# Altium PCB SystemV1.PcbDoc (part 1 of 3)
Units mm, origin at the board's own origin, x right, y up, seen from the top; angles counter-clockwise.
Board outline 488.95 x 74.14 mm, 4 copper layers (Top Layer, GND, VCC, Bottom Layer), stack 1.586 mm thick; 264 components, 188 nets, 862 pads, 658 vias.
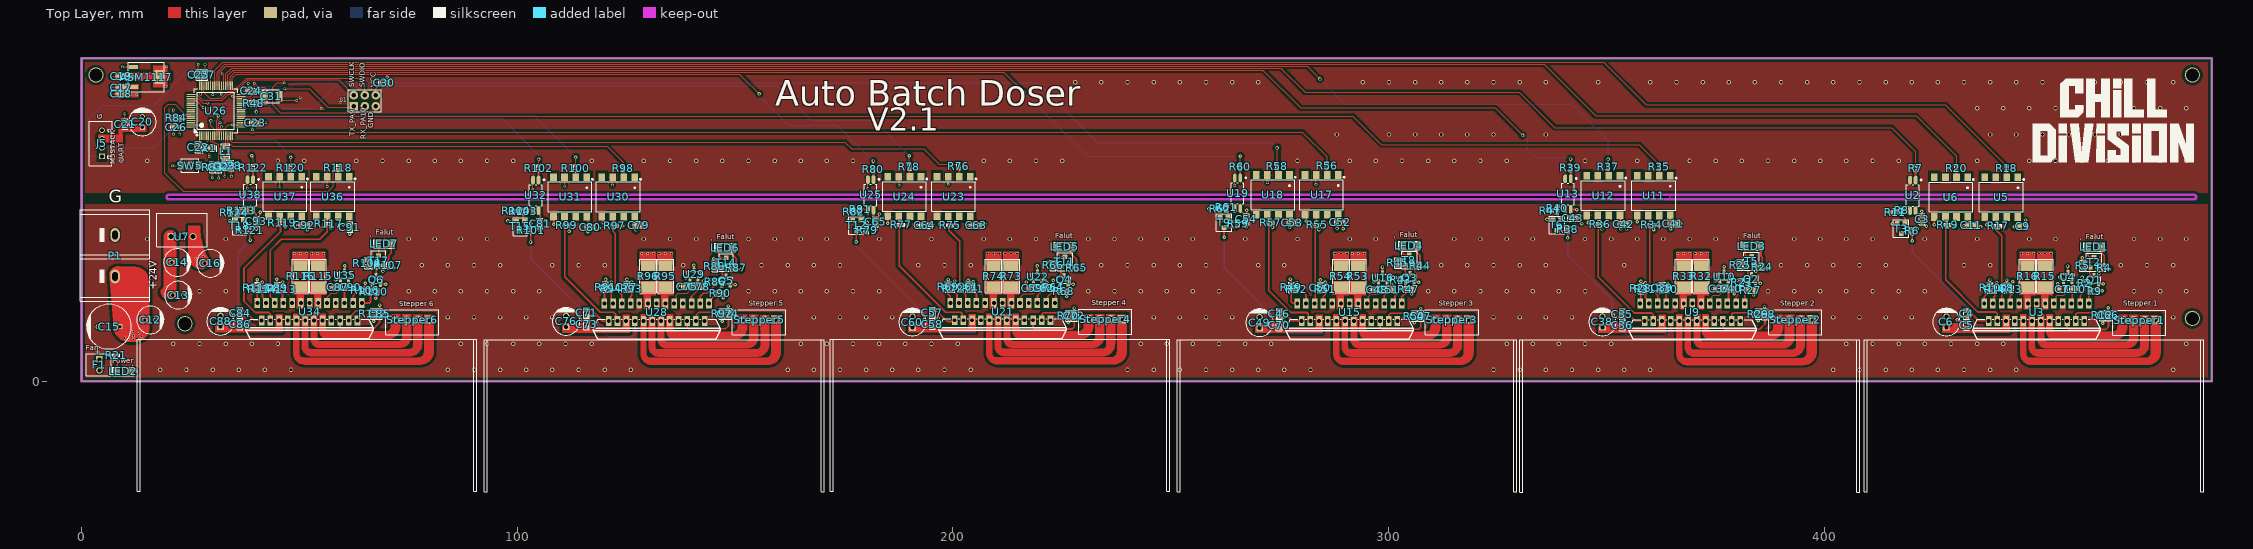
[diagram p0: Top Layer view]
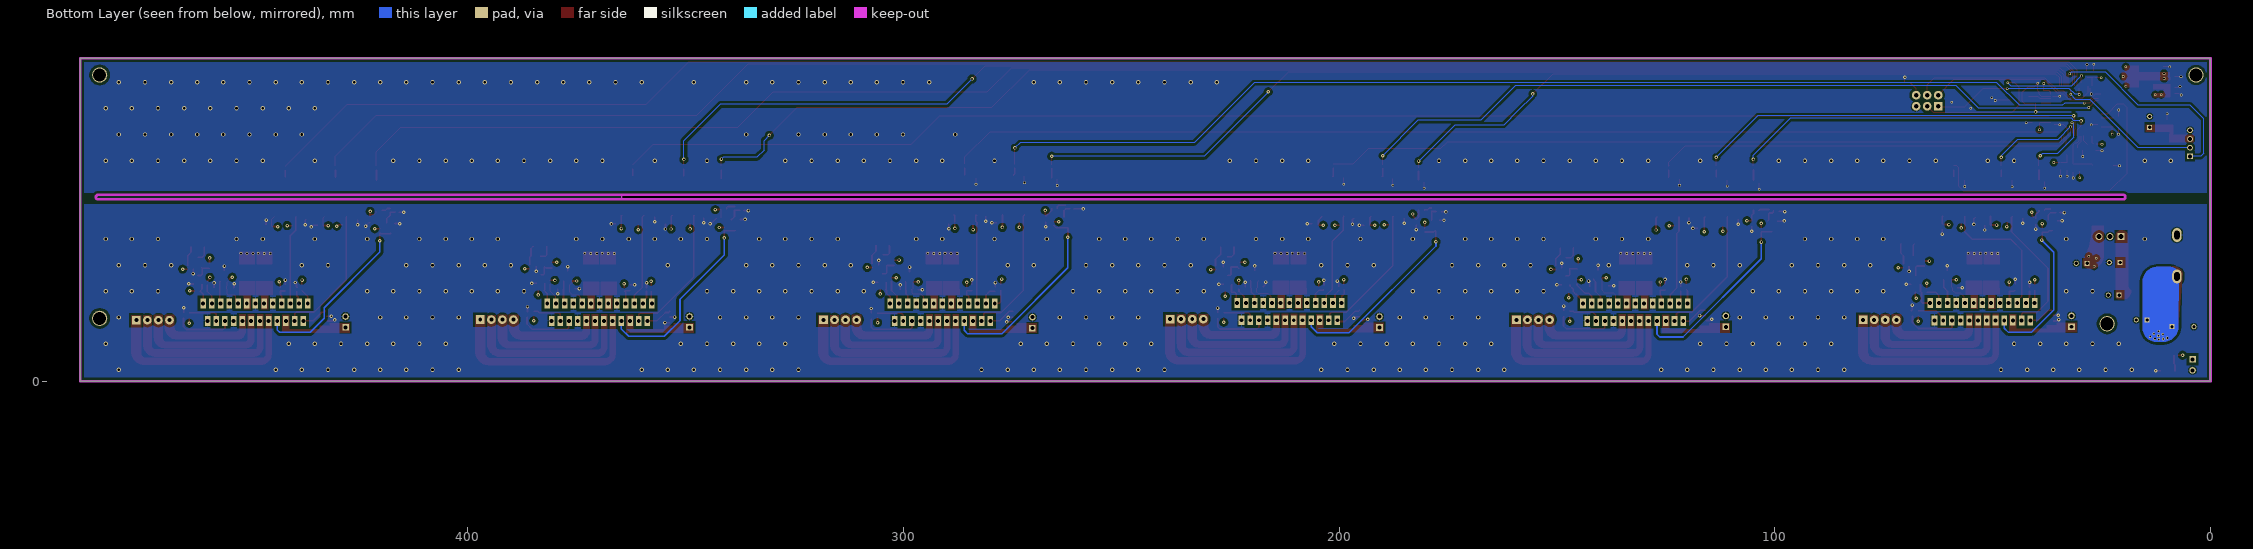
[diagram p1: Bottom Layer view, seen from below]
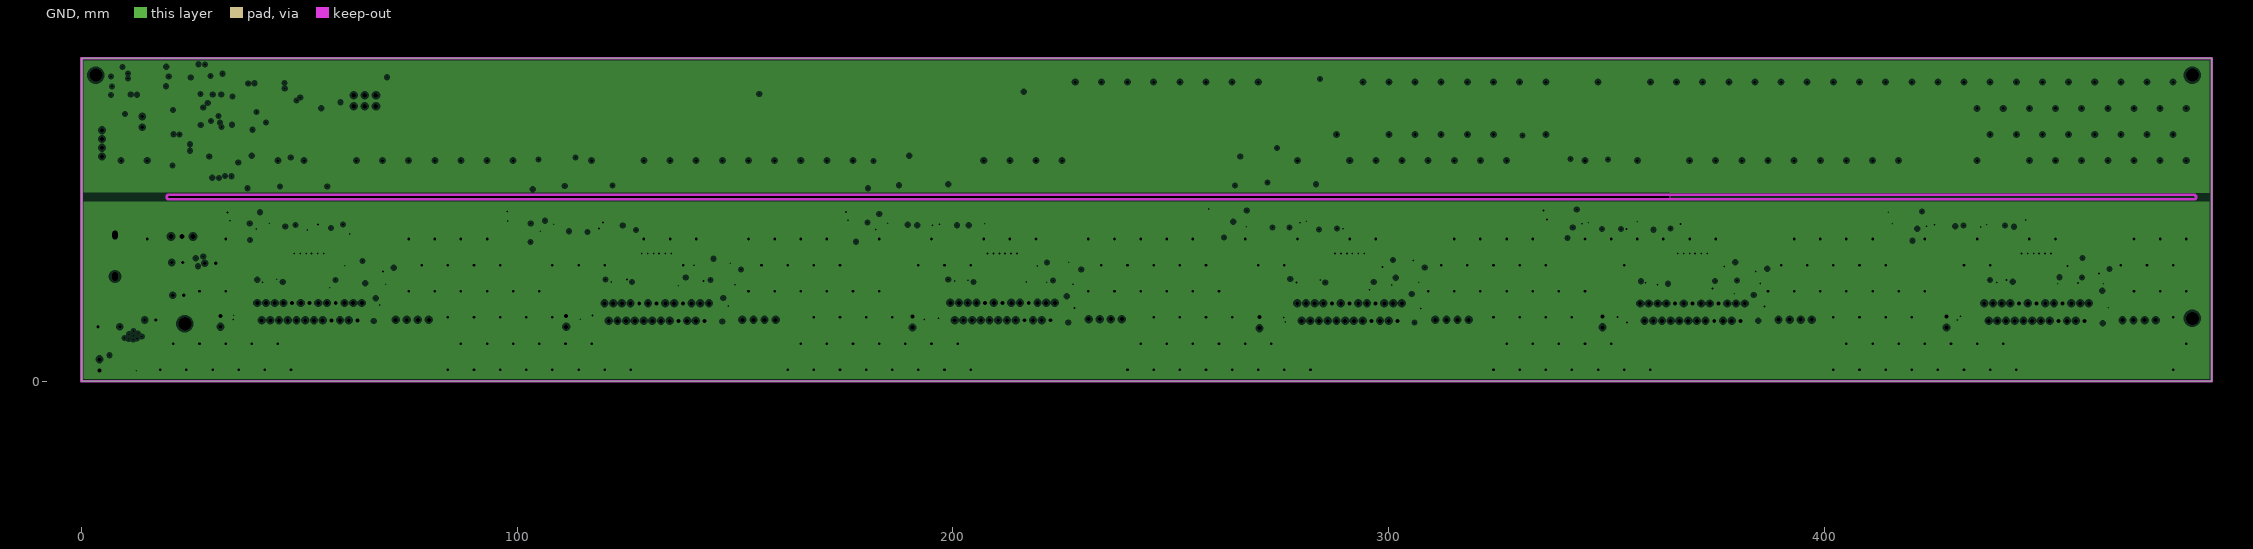
[diagram p2: GND, clearances drawn from the general rule]
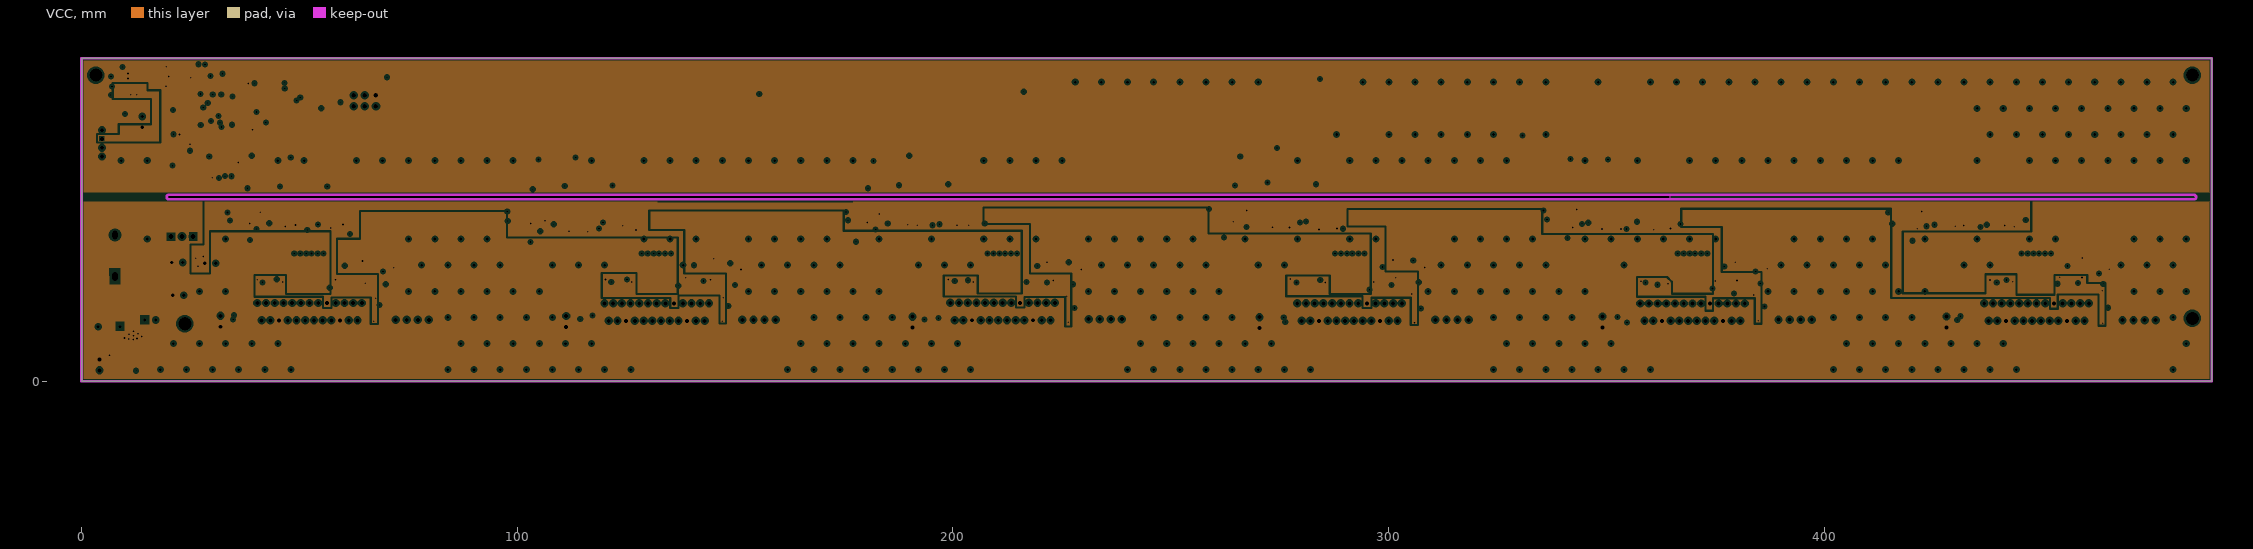
[diagram p3: VCC, clearances drawn from the general rule]
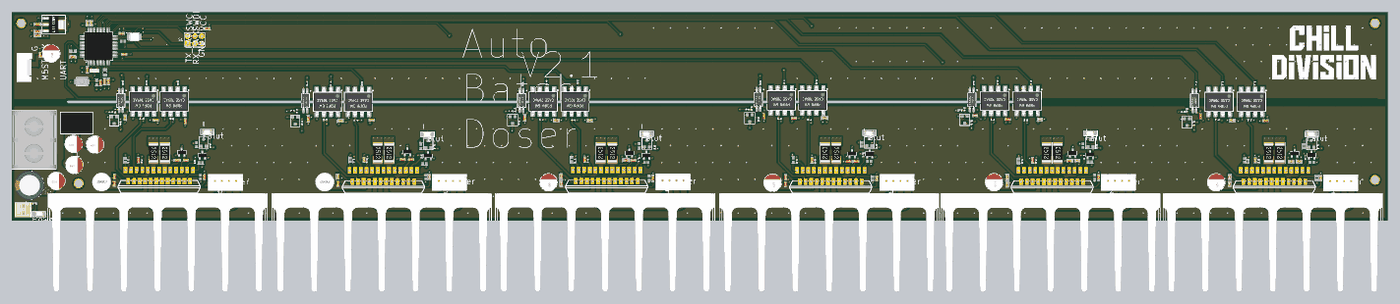
[diagram p6: 3D render of the assembled board from above, using the file's embedded part models]

## Layer stack, top to bottom
Top Solder: solder mask 0.0102, Solder Resist, Dk 3.5
Top Layer: signal copper 0.035
Dielectric 2: prepreg 0.2104, PP-006, Dk 4.1
GND: plane copper 0.0152, net GND
Dielectric 1: dielectric 1.065, FR-4, Dk 4.8
VCC: plane copper 0.0152, net (Multiple Nets)
Dielectric 3: prepreg 0.2104, PP-006, Dk 4.1
Bottom Layer: signal copper 0.035
Bottom Solder: solder mask 0.0102, Solder Resist, Dk 3.5

## Board outline
0,0 0,74.143 488.95,74.143 488.95,0
cut-out: 20.051,41.758 364.054,41.758 364.156,41.746 ccw(c364.156,42.254) 364.156,42.762 364.092,42.774 20.051,42.774 20.051,42.785 ccw(c20.051,42.277)

## Design rules (kind name [scope] priority, off if disabled: settings)
Clearance Clearance_3 [InNamedPolygon('NONET_L-01_P-001') Or InNamedPolygon('NONET_L-01_P-001') Or InNamedPolygon('NONET_L-01_P-001') Or InNamedPolygon('NONET_L-01_P-001')] p1: gap=0.6 ignorepadtopadclearanceinfootprint=FALSE
Clearance Clearance_1 [InNamedPolygon('NONET_L-01_P-001') Or InNamedPolygon('NONET_L-01_P-001') Or InNamedPolygon('NONET_L-01_P-001') Or InNamedPolygon('NONET_L-01_P-001')] p2: gap=0.6 ignorepadtopadclearanceinfootprint=FALSE
Clearance Clearance_2 [InNamedPolygon('NONET_L-01_P-001') Or InNamedPolygon('NONET_L-01_P-001')] p3: gap=0.6 ignorepadtopadclearanceinfootprint=FALSE
Clearance [All] p4: gap=0.203 ignorepadtopadclearanceinfootprint=TRUE
Height [All] p1: minheight=0 maxheight=90 prefheight=12.7
HoleSize [All] p1: absolutevalues=TRUE maxlimit=5 minlimit=0.025 maxpercent=80.000 minpercent=20.000
MinimumSolderMaskSliver [All] p1: minsoldermaskwidth=0.01
PlaneClearance [All] p1: clearance=0.508
PlaneConnect [All] p1: planeconnectstyle=Direct reliefexpansion=0.508 reliefentries=4 reliefconductorwidth=0.254 reliefairgap=0.254
PolygonConnect PolygonConnect_1 [All vs IsNamedPolygon('NONET_L-01_P-001') Or IsNamedPolygon('NONET_L-01_P-001') Or IsNamedPolygon('NONET_L-01_P-001') Or IsNamedPolygon('NONET_L-01_P-001')] p1: thpad.connectstyle=Relief thpad.reliefconductorwidth=0.254 thpad.reliefentries=4 thpad.polygonreliefangle="90 Angle" thpad.airgapwidth=0.254 smdpad.connectstyle=Relief smdpad.reliefconductorwidth=0.254 smdpad.reliefentries=4 smdpad.polygonreliefangle="90 Angle" smdpad.airgapwidth=0.254 via.connectstyle=Direct via.reliefconductorwidth=0.254 via.reliefentries=4 via.polygonreliefangle="90 Angle" via.airgapwidth=0.254
PolygonConnect [All] p2: thpad.connectstyle=Relief thpad.reliefconductorwidth=0.254 thpad.reliefentries=4 thpad.polygonreliefangle="90 Angle" thpad.airgapwidth=0.254 smdpad.connectstyle=Direct smdpad.reliefconductorwidth=0.254 smdpad.reliefentries=4 smdpad.polygonreliefangle="90 Angle" smdpad.airgapwidth=0.254 via.connectstyle=Direct via.reliefconductorwidth=0.254 via.reliefentries=4 via.polygonreliefangle="90 Angle" via.airgapwidth=0.254
RoutingVias [All] p1: holewidth=1 width=1.5 viastyle="Through Hole" minholewidth=0.4 minwidth=0.8 maxholewidth=0.4 maxwidth=0.8
SilkToSilkClearance [All] p1: silktosilkclearance=0.01
SilkToSolderMaskClearance [IsPad] p1: minsilkscreentomaskgap=0.01 clearancetoexposedcopper=TRUE
SolderMaskExpansion [All] p1: expansion=0.102 istentingtop=FALSE
Width [All] p1: maxlimit=2 minlimit=0.1 preferedwidth=0.8
23 further rules are at their usual default settings.

## Classes and differential pairs
component class "Stepper Motor6": C84 C85 C86 C87 C88 C89 C90 C91 C92 C93 LED7 Q6 R106 R107 R108 R110 R111 R112 R113 R114 R115 R116 R117 R118 R119 R120 R121 R122 R123 R124 Stepper6 T17 T18 U34 U35 U36 U37 U38
component class "Stepper Motor5": C71 C73 C74 C75 C76 C77 C78 C79 C80 C81 LED6 Q5 R86 R87 R88 R90 R91 R92 R93 R94 R95 R96 R97 R98 R99 R100 R101 R102 R103 R104 Stepper5 T14 T15 U28 U29 U30 U31 U32
component class STM: C22 C23 C24 C25 C26 C27 C28 C29 C30 C31 C32 L1 R48 R83 R84 S1 SW5 U26 X1
component class "Stepper Motor4": C57 C58 C59 C60 C61 C62 C63 C64 C65 C72 LED5 Q4 R64 R65 R66 R68 R69 R70 R71 R72 R73 R74 R75 R76 R77 R78 R79 R80 R81 R82 Stepper4 T11 T12 U21 U22 U23 U24 U25
component class "Stepper Motor3": C46 C47 C48 C49 C50 C51 C52 C53 C54 C70 LED4 Q3 R43 R44 R45 R47 R49 R50 R51 R52 R53 R54 R55 R56 R57 R58 R59 R60 R61 R62 Stepper3 T8 T9 U15 U16 U17 U18 U19
component class "Stepper Motor2": C35 C36 C37 C38 C39 C40 C41 C42 C43 C68 LED3 Q2 R23 R24 R25 R27 R28 R29 R30 R31 R32 R33 R34 R35 R36 R37 R38 R39 R40 R41 Stepper2 T5 T6 U9 U10 U11 U12 U13
component class POWER: ASM1117 C12 C13 C14 C15 C16 C17 C18 C19 C20 C21 F1 J1 J5 LED2 P1 R21 U7
component class "Stepper Motor1": C3 C4 C5 C6 C7 C8 C9 C10 C11 C66 LED1 Q1 R2 R4 R5 R6 R7 R8 R9 R10 R11 R12 R13 R14 R15 R16 R17 R18 R19 R20 Stepper1 T2 T3 U2 U3 U4 U5 U6

## Components (designator, comment, footprint, x,y, rotation, side; value= is the part's Value field where it differs from the comment)
ASM1117 "AMS1117 - 3.3V Reg" SOT229P700X180-4N 14.859,69.825 r0 top
C3 "0.1uF/50V" PCBCOMPONENT_1 422.478,37.186 r90 top
C4 "0.1uF/50V" PCBCOMPONENT_1 432.689,15.454 r90 top
C5 "0.1uF/50V" PCBCOMPONENT_1 432.664,12.903 r270 top
C6 "4u7" CAPLEAD_D6.3MM#1 428.041,12.344 r90 top
C7 "10uF/25V" PCBCOMPONENT_1 454.675,21.107 r0 top
C8 "0.1uF/50V" PCBCOMPONENT_1 441.909,21.437 r270 top
C9 "0.1uF/50V" PCBCOMPONENT_1 445.592,35.535 r180 top
C10 "1uF/16V" PCBCOMPONENT_1 457.581,21.107 r180 top
C11 "0.1uF/50V" PCBCOMPONENT_1 433.781,35.789 r180 top
C12 "100uF/50V" CAPLEAD_D6.3MM#2 14.529,14.072 r0 top
C13 "33uF/50V" CAPLEAD_D6.3MM#2 20.955,19.761 r0 top
C14 "10uF/100V" CAPLEAD_D6.3MM#2 20.716,27.254 r0 top
C15 "470uF/50V" CAPLEAD_D10mm 8.81,12.522 r180 top
C16 "33uF/50V" CAPLEAD_D6.3MM#2 28.31,27.051 r0 top
C17 "1uF/16V" PCBCOMPONENT_1 9.144,67.412 r0 top
C18 "22uF/16V" PCBCOMPONENT_1 9.144,66.015 r0 top
C19 "22uF/16V" PCBCOMPONENT_1 9.144,69.952 r0 top
C20 "33uF/50V" CAPLEAD_D6.3MM#2 13.97,58.268 r90 top
C21 "0.1uF/50V" PCBCOMPONENT_1 10.033,59.03 r270 top
C22 "0.1uF/50V" PCBCOMPONENT_1 26.797,53.696 r90 top
C23 "0.1uF/50V" PCBCOMPONENT_1 39.878,59.284 r180 top
C24 "0.1uF/50V" PCBCOMPONENT_1 38.989,66.65 r180 top
C25 "0.1uF/50V" PCBCOMPONENT_1 26.924,70.333 r270 top
C26 "0.1uF/50V" PCBCOMPONENT_1 21.717,58.268 r0 top
C27 "4.7uF/25V" PCBCOMPONENT_1 28.321,70.333 r270 top
C28 "1uF/16V" PCBCOMPONENT_1 34.29,49.49 r90 top
C29 "10nF/50V" PCBCOMPONENT_1 32.893,49.505 r90 top
C30 "0.1uF/50V" PCBCOMPONENT_1 69.494,68.478 r180 top
C31 "4.7uF/16V" CASE-B_3528 43.561,65.38 r0 top
C32 "0.1uF/50V" PCBCOMPONENT_1 31.496,49.109 r90 top
C35 "0.1uF/50V" PCBCOMPONENT_1 353.644,15.377 r90 top
C36 "0.1uF/50V" PCBCOMPONENT_1 353.644,12.802 r270 top
C37 "10uF/25V" PCBCOMPONENT_1 375.981,21.209 r0 top
C38 "4u7" CAPLEAD_D6.3MM#1 349.098,12.359 r90 top
C39 "0.1uF/50V" PCBCOMPONENT_1 362.814,21.488 r270 top
C40 "1uF/16V" PCBCOMPONENT_1 378.663,21.209 r180 top
C41 "0.1uF/50V" PCBCOMPONENT_1 365.379,36.144 r180 top
C42 "0.1uF/50V" PCBCOMPONENT_1 353.974,36.043 r180 top
C43 "0.1uF/50V" PCBCOMPONENT_1 342.316,37.389 r180 top
C46 "0.1uF/50V" PCBCOMPONENT_1 274.93,15.428 r90 top
C47 "0.1uF/50V" PCBCOMPONENT_1 307.391,14.935 r270 top
C48 "10uF/25V" PCBCOMPONENT_1 297.383,21.006 r0 top
C49 "4u7" CAPLEAD_D6.3MM#1 270.383,12.192 r90 top
C50 "0.1uF/50V" PCBCOMPONENT_1 284.328,21.488 r270 top
C51 "1uF/16V" PCBCOMPONENT_1 300.05,21.006 r180 top
C52 "0.1uF/50V" PCBCOMPONENT_1 288.874,36.449 r180 top
C53 "0.1uF/50V" PCBCOMPONENT_1 277.927,36.398 r180 top
C54 "0.1uF/50V" PCBCOMPONENT_1 267.36,37.186 r90 top
C57 "0.1uF/50V" PCBCOMPONENT_1 195.301,15.708 r90 top
C58 "0.1uF/50V" PCBCOMPONENT_1 195.301,13.132 r270 top
C59 "10uF/25V" PCBCOMPONENT_1 218.262,21.387 r0 top
C60 "4u7" CAPLEAD_D6.3MM#1 190.729,12.334 r90 top
C61 "0.1uF/50V" PCBCOMPONENT_1 203.556,21.641 r270 top
C62 "1uF/16V" PCBCOMPONENT_1 220.828,21.361 r180 top
C63 "0.1uF/50V" PCBCOMPONENT_1 205.384,35.789 r180 top
C64 "0.1uF/50V" PCBCOMPONENT_1 193.573,35.789 r180 top
C65 "0.1uF/50V" PCBCOMPONENT_1 182.27,36.551 r90 top
C66 "0.1uF/50V" PCBCOMPONENT_1 465.226,15.088 r270 top
C68 "0.1uF/50V" PCBCOMPONENT_1 386.283,15.367 r270 top
C70 "0.1uF/50V" PCBCOMPONENT_1 274.904,12.852 r270 top
C71 "0.1uF/50V" PCBCOMPONENT_1 115.926,15.661 r90 top
C72 "0.1uF/50V" PCBCOMPONENT_1 227.889,15.037 r270 top
C73 "0.1uF/50V" PCBCOMPONENT_1 115.951,13.056 r270 top
C74 "0.1uF/50V" PCBCOMPONENT_1 148.438,15.494 r270 top
C75 "10uF/25V" PCBCOMPONENT_1 138.989,21.717 r0 top
C76 "4u7" CAPLEAD_D6.3mm 111.227,12.486 r90 top
C77 "0.1uF/50V" PCBCOMPONENT_1 125.197,21.615 r270 top
C78 "1uF/16V" PCBCOMPONENT_1 141.808,21.692 r180 top
C79 "0.1uF/50V" PCBCOMPONENT_1 127.904,35.814 r180 top
C80 "0.1uF/50V" PCBCOMPONENT_1 116.815,35.382 r180 top
C81 "0.1uF/50V" PCBCOMPONENT_1 105.283,36.18 r90 top
C84 "0.1uF/50V" PCBCOMPONENT_1 36.398,15.621 r90 top
C85 "0.1uF/50V" PCBCOMPONENT_1 68.402,15.494 r270 top
C86 "0.1uF/50V" PCBCOMPONENT_1 36.398,13.03 r270 top
C87 "10uF/25V" PCBCOMPONENT_1 58.777,21.514 r0 top
C88 "4u7" CAPLEAD_D6.3mm 31.902,12.497 r90 top
C89 "0.1uF/50V" PCBCOMPONENT_1 44.958,21.463 r270 top
C90 "1uF/16V" PCBCOMPONENT_1 61.825,21.514 r180 top
C91 "0.1uF/50V" PCBCOMPONENT_1 61.595,35.393 r90 top
C92 "0.1uF/50V" PCBCOMPONENT_1 51.156,35.814 r180 top
C93 "0.1uF/50V" PCBCOMPONENT_1 40.132,36.678 r90 top
F1 "" "PinHeader Polar" 4.115,3.759 r270 top
J5 "Header 4P*2mm" CONN-TH_4P-P2.00_HX20020-4A_2 4.699,51.601 r270 top
L1 "CMI201209X100KT" INDC2012X06N 33.071,52.807 r90 top
LED1 "1206 LED" "1206 LED" 461.721,30.937 r180 top
LED2 "1206 LED" "1206 LED" 9.881,2.159 r0 top
LED3 "1206 LED" "1206 LED" 383.159,31.14 r180 top
LED4 "1206 LED" "1206 LED" 304.521,31.267 r180 top
LED5 "1206 LED" "1206 LED" 225.4,30.963 r180 top
LED6 "1206 LED" "1206 LED" 147.472,30.734 r180 top
LED7 "1206 LED" "1206 LED" 69.24,31.623 r180 top
P1 "WJ45C-B-9.5-2P" CONN-TH_2P-P9.50_WJ45C-B-2P 7.696,28.804 r270 top
Q1 "C400505" SOT-23-3_L2.9-W1.3-P1.90-LS2.4-BR 461.95,23.266 r270 top
Q2 "C400505" SOT-23-3_L2.9-W1.3-P1.90-LS2.4-BR 383.271,23.454 r270 top
Q3 "C400505" SOT-23-3_L2.9-W1.3-P1.90-LS2.4-BR 304.876,23.698 r270 top
Q4 "C400505" SOT-23-3_L2.9-W1.3-P1.90-LS2.4-BR 225.527,23.241 r270 top
Q5 "C400505" SOT-23-3_L2.9-W1.3-P1.90-LS2.4-BR 147.955,23.114 r270 top
Q6 "C400505" SOT-23-3_L2.9-W1.3-P1.90-LS2.4-BR 67.642,23.241 r270 top
R2 "4.7KR" R0402 459.765,22.504 r270 top
R4 "4.7KR" R0402 464.287,26.086 r90 top
R5 "24KR" RESC1608X06N 459.308,26.492 r90 top
R6 "4.7KR" R0402 420.192,34.493 r270 top
R7 "1K" R0402 420.954,48.87 r90 top
R8 "4.7KR" R0402 417.779,39.218 r90 top
R9 "33KR" RESC1608X06N 462.026,20.676 r0 top
R10 "33KR" RESC1608X06N 438.099,21.437 r90 top
R11 "4.7KR" R0402 416.255,38.837 r180 top
R12 "0R" RESC1608X06N 463.855,15.088 r270 top
R13 "4.7KR" R0402 443.052,21.056 r270 top
R14 "51KR" R0402 439.217,21.03 r90 top
R15 "0.2R" RESC6431X12N 450.621,24.105 r270 top
R16 "0.2R" RESC6431X12N 446.659,24.105 r270 top
R17 "4.7KR" R0402 439.877,35.662 r180 top
R18 "330R" R0402 441.909,48.87 r90 top
R19 "4.7KR" R0402 428.32,35.916 r180 top
R20 "330R" R0402 430.352,48.87 r90 top
R21 "4.7KR" R0402 7.95,5.944 r0 top
R23 "4.7KR" R0402 381.102,22.708 r270 top
R24 "4.7KR" R0402 385.801,26.264 r90 top
R25 "24KR" RESC1608X06N 380.67,26.645 r90 top
R27 "33KR" RESC1608X06N 383.159,20.904 r0 top
R28 "33KR" RESC1608X06N 357.886,21.31 r90 top
R29 "0R" RESC1608X06N 384.886,15.392 r270 top
R30 "4.7KR" R0402 363.982,21.107 r270 top
R31 "51KR" R0402 358.953,21.082 r90 top
R32 "0.2R" RESC6431X12N 371.754,24.105 r270 top
R33 "0.2R" RESC6431X12N 367.741,24.105 r270 top
R34 "4.7KR" R0402 360.401,35.865 r180 top
R35 "330R" R0402 362.128,49.2 r90 top
R36 "4.7KR" R0402 348.539,36.068 r180 top
R37 "330R" R0402 350.444,49.2 r90 top
R38 "4.7KR" R0402 341.173,34.849 r270 top
R39 "1K" R0402 341.808,48.946 r90 top
R40 "4.7KR" R0402 338.76,39.675 r90 top
R41 "4.7KR" R0402 337.109,39.167 r180 top
R43 "4.7KR" R0402 302.743,23.317 r270 top
R44 "4.7KR" R0402 307.213,26.543 r90 top
R45 "24KR" RESC1608X06N 302.108,27.153 r90 top
R47 "33KR" RESC1608X06N 304.673,21.133 r0 top
R48 "24KR" RESC1608X06N 39.497,63.856 r180 top
R49 "33KR" RESC1608X06N 277.673,21.514 r90 top
R50 "0R" RESC1608X06N 305.943,14.961 r270 top
R51 "4.7KR" R0402 285.471,21.133 r270 top
R52 "51KR" R0402 278.892,21.107 r90 top
R53 "0.2R" RESC6431X12N 292.964,24.105 r270 top
R54 "0.2R" RESC6431X12N 289.052,24.105 r270 top
R55 "4.7KR" R0402 283.591,35.916 r180 top
R56 "330R" R0402 285.902,49.429 r90 top
R57 "4.7KR" R0402 272.948,36.424 r180 top
R58 "330R" R0402 274.472,49.378 r90 top
R59 "4.7KR" R0402 265.455,36.17 r270 top
R60 "1K" R0402 265.963,49.251 r90 top
R61 "4.7KR" R0402 262.788,39.98 r90 top
R62 "4.7KR" R0402 261.341,39.599 r180 top
R64 "4.7KR" R0402 223.012,21.59 r270 top
R65 "4.7KR" R0402 228.371,26.06 r90 top
R66 "24KR" RESC1608X06N 222.987,26.568 r90 top
R68 "33KR" RESC1608X06N 225.476,20.625 r0 top
R69 "33KR" RESC1608X06N 198.933,21.666 r90 top
R70 "0R" RESC1608X06N 226.492,15.037 r270 top
R71 "4.7KR" R0402 204.699,21.26 r270 top
R72 "51KR" R0402 200.05,21.26 r90 top
R73 "0.2R" RESC6431X12N 213.411,24.105 r270 top
R74 "0.2R" RESC6431X12N 209.321,24.105 r270 top
R75 "4.7KR" R0402 199.415,35.789 r180 top
R76 "330R" R0402 201.32,49.378 r90 top
R77 "4.7KR" R0402 188.112,35.916 r180 top
R78 "330R" R0402 190.017,49.251 r90 top
R79 "4.7KR" R0402 180.356,34.678 r270 top
R80 "1K" R0402 181.762,48.616 r90 top
R81 "4.7KR" R0402 178.714,39.421 r90 top
R82 "4.7KR" R0402 177.241,38.938 r180 top
R83 "24KR" RESC1608X06N 30.099,49.124 r90 top
R84 "24KR" RESC1608X06N 21.717,60.427 r0 top
R86 "4.7KR" R0402 145.491,22.835 r270 top
R87 "4.7KR" R0402 150.266,26.086 r90 top
R88 "24KR" RESC1608X06N 145.364,26.391 r90 top
R90 "33KR" RESC1608X06N 146.634,20.244 r0 top
R91 "33KR" RESC1608X06N 120.294,21.615 r90 top
R92 "0R" RESC1608X06N 147.066,15.494 r270 top
R93 "4.7KR" R0402 126.314,21.234 r270 top
R94 "51KR" R0402 121.59,21.234 r90 top
R95 "0.2R" RESC6431X12N 134.01,24.105 r270 top
R96 "0.2R" RESC6431X12N 130.048,24.105 r270 top
R97 "4.7KR" R0402 122.403,35.738 r180 top
R98 "330R" R0402 124.333,48.895 r90 top
R99 "4.7KR" R0402 111.379,35.814 r180 top
R100 "330R" R0402 113.411,48.895 r90 top
R101 "4.7KR" R0402 103.124,34.671 r270 top
R102 "1K" R0402 104.902,48.895 r90 top
R103 "4.7KR" R0402 101.346,38.989 r90 top
R104 "4.7KR" R0402 99.822,39.116 r180 top
R106 "4.7KR" R0402 65.1,20.829 r270 top
R107 "4.7KR" R0402 70.46,26.594 r90 top
R108 "24KR" RESC1608X06N 65.608,27.076 r90 top
R110 "33KR" RESC1608X06N 67.132,20.574 r0 top
R111 "33KR" RESC1608X06N 40.361,21.474 r90 top
R112 "0R" RESC1608X06N 67.005,15.494 r270 top
R113 "4.7KR" R0402 46.126,21.093 r270 top
R114 "51KR" R0402 41.529,21.067 r90 top
R115 "0.2R" RESC6431X12N 54.28,24.105 r270 top
R116 "0.2R" RESC6431X12N 50.292,24.105 r270 top
R117 "4.7KR" R0402 56.769,36.17 r180 top
R118 "330R" R0402 58.928,48.997 r90 top
R119 "4.7KR" R0402 46.101,36.424 r180 top
R120 "330R" R0402 48.006,48.997 r90 top
R121 "4.7KR" R0402 38.608,34.646 r270 top
R122 "1K" R0402 39.37,48.997 r90 top
R123 "4.7KR" R0402 36.703,39.091 r90 top
R124 "4.7KR" R0402 35.052,38.71 r180 top
S1 "Header 3X2" HDR2X3 62.484,63.119 r0 top
Stepper1 "Header 4 Pin Polar" PCBComponent_1 472.262,14.021 r180 top
Stepper2 "Header 4 Pin Polar" PCBComponent_1 393.319,14.148 r180 top
Stepper3 "Header 4 Pin Polar" PCBComponent_1 314.554,14.097 r180 top
Stepper4 "Header 4 Pin Polar" PCBComponent_1 234.975,14.249 r180 top
Stepper5 "Header 4 Pin Polar" PCBComponent_1 155.499,14.097 r180 top
Stepper6 "Header 4 Pin Polar" PCBComponent_1 75.921,14.097 r180 top
SW5 "C492861" SW-SMD_L4.0-W3.0-LS4.8 24.892,49.505 r0 top
T2 "MMBT3904 Transistor" MMBT3904 461.913,27.286 r90 top
T3 "MMBT3904 Transistor" MMBT3904 417.652,35.027 r270 top
T5 "MMBT3904 Transistor" MMBT3904 383.351,27.514 r90 top
T6 "MMBT3904 Transistor" MMBT3904 338.633,35.865 r270 top
T8 "MMBT3904 Transistor" MMBT3904 304.76,27.819 r90 top
T9 "MMBT3904 Transistor" MMBT3904 262.23,36.424 r270 top
T11 "MMBT3904 Transistor" MMBT3904 225.704,27.407 r90 top
T12 "MMBT3904 Transistor" MMBT3904 177.932,35.764 r270 top
T14 "MMBT3904 Transistor" MMBT3904 147.98,27.153 r90 top
T15 "MMBT3904 Transistor" MMBT3904 100.711,35.56 r270 top
T17 "MMBT3904 Transistor" MMBT3904 68.188,27.668 r90 top
T18 "MMBT3904 Transistor" MMBT3904 36.311,35.732 r270 top
U2 "TLP291(GB-TP,SE" SOP-4-1.27mm 420.319,42.647 r90 top
U3 "TB6600HG" "HZIP25-P-1.0_TB6600HG - HEATSINK" 460.716,17.868 r180 top locked
U4 "REF3318AIDBZR" SOT-23-3_L2.9-W1.3-P1.90-LS2.4-BR 455.905,23.901 r270 top
U5 "6N137S-TA1-L" SOP-8_L9.8-W6.6-P2.54-LS10.3-BL 440.639,42.266 r180 top
U6 "6N137S-TA1-L" SOP-8_L9.8-W6.6-P2.54-LS10.3-BL 429.082,42.266 r180 top
U7 "C5369649" SIP-3 25.629,33.274 r180 top
U9 "TB6600HG" "HZIP25-P-1.0_TB6600HG - HEATSINK" 381.748,17.843 r180 top locked
U10 "REF3318AIDBZR" SOT-23-3_L2.9-W1.3-P1.90-LS2.4-BR 377.012,24.003 r270 top
U11 "6N137S-TA1-L" SOP-8_L9.8-W6.6-P2.54-LS10.3-BL 360.858,42.596 r180 top
U12 "6N137S-TA1-L" SOP-8_L9.8-W6.6-P2.54-LS10.3-BL 349.301,42.596 r180 top
U13 "TLP291(GB-TP,SE" SOP-4-1.27mm 341.173,42.977 r90 top
U15 "TB6600HG" "HZIP25-P-1.0_TB6600HG - HEATSINK" 303.037,17.868 r180 top locked
U16 "REF3318AIDBZR" SOT-23-3_L2.9-W1.3-P1.90-LS2.4-BR 298.653,23.8 r270 top
U17 "6N137S-TA1-L" SOP-8_L9.8-W6.6-P2.54-LS10.3-BL 284.632,42.774 r180 top
U18 "6N137S-TA1-L" SOP-8_L9.8-W6.6-P2.54-LS10.3-BL 273.456,42.774 r180 top
U19 "TLP291(GB-TP,SE" SOP-4-1.27mm 265.328,43.155 r90 top
U21 "TB6600HG" "HZIP25-P-1.0_TB6600HG - HEATSINK" 223.404,17.995 r180 top locked
U22 "REF3318AIDBZR" SOT-23-3_L2.9-W1.3-P1.90-LS2.4-BR 219.456,24.028 r270 top
U23 "6N137S-TA1-L" SOP-8_L9.8-W6.6-P2.54-LS10.3-BL 200.177,42.393 r180 top
U24 "6N137S-TA1-L" SOP-8_L9.8-W6.6-P2.54-LS10.3-BL 188.874,42.393 r180 top
U25 "TLP291(GB-TP,SE" SOP-4-1.27mm 181.127,42.774 r90 top
U26 "STM32" LQFP-64_L10.0-W10.0-P0.50-LS12.0-BL 30.861,62.078 r0 top
U28 "TB6600HG" "HZIP25-P-1.0_TB6600HG - HEATSINK" 144.02,17.868 r180 top locked
U29 "REF3318AIDBZR" SOT-23-3_L2.9-W1.3-P1.90-LS2.4-BR 140.574,24.495 r270 top
U30 "6N137S-TA1-L" SOP-8_L9.8-W6.6-P2.54-LS10.3-BL 123.19,42.291 r180 top
U31 "6N137S-TA1-L" SOP-8_L9.8-W6.6-P2.54-LS10.3-BL 112.141,42.291 r180 top
U32 "TLP291(GB-TP,SE" SOP-4-1.27mm 104.267,42.672 r90 top
U34 "TB6600HG" "HZIP25-P-1.0_TB6600HG - HEATSINK" 64.345,17.97 r180 top locked
U35 "REF3318AIDBZR" SOT-23-3_L2.9-W1.3-P1.90-LS2.4-BR 60.362,24.292 r270 top
U36 "6N137S-TA1-L" SOP-8_L9.8-W6.6-P2.54-LS10.3-BL 57.658,42.393 r180 top
U37 "6N137S-TA1-L" SOP-8_L9.8-W6.6-P2.54-LS10.3-BL 46.736,42.393 r180 top
U38 "TLP291(GB-TP,SE" SOP-4-1.27mm 38.735,42.774 r90 top
X1 "8MHz" SMD3213-3P 29.337,53.442 r0 top

## Footprints (in the part's own frame and the unit in brackets; to place one, negate y for a bottom-side part, rotate by r counter-clockwise, add the part's x,y. Pads: shape width x height; smd on the part's side, far side on the other; paste and mask are expansions set on the pad)
"1206 LED" [mm]
  rect 1.5x1.6 smd: 1(-1.778,0.127) 2(1.27,0.127)
  silkscreen extent -2.67,-0.89 2.16,1.07, body extent -1.7,-0.69 1.5,0.91, height 1.1
CAPLEAD_D6.3MM#1 [mm]
  rect 1.5x1.5 hole 0.9: 1(0,0)
  round 1.5 hole 0.9: 2(2.5,0)
  silkscreen extent -1.9,-3.15 4.43,3.15, body extent -1.91,-3.18 4.39,3.12, height 9
CAPLEAD_D6.3MM#2 [mm]
  rect 1.15x1.15 / inner round 1.15 / far side rect 1.15x1.15 hole 0.75: 1(0,0)
  round 1.15 hole 0.75: 2(2.5,0)
  silkscreen extent -1.9,-3.15 4.43,3.15, body extent -1.91,-3.18 4.39,3.12, height 9
CAPLEAD_D6.3mm [mm]
  rect 1.5x1.5 hole 0.9: 1(0,0)
  round 1.5 hole 0.9: 2(2.5,0)
  silkscreen extent -1.9,-3.15 4.43,3.15, body extent -2.18,-3.37 4.62,3.43, height 12.1
CAPLEAD_D10mm [mm]
  rect 1.15x1.15 / inner round 1.15 / far side rect 1.15x1.15 hole 0.75: 1(0,0)
  round 1.15 hole 0.75: 2(5,0)
  silkscreen extent -2.63,-5.12 7.67,5.12, body extent -2.71,-5.25 7.79,5.25, height 14
CASE-B_3528 [mm]
  rect 1.506x2.376 smd paste+0 mask+0.051: 1(-1.861,0) 2(1.861,0)
  silkscreen extent -2.85,-1.55 1.83,1.63, body extent -1.85,-1.4 1.85,1.4, height 2
CONN-TH_2P-P9.50_WJ45C-B-2P [mm]
  oval 3.2x2.2 hole 1.2 slot 2 at 0 deg: 1(-4.75,0) 2(4.75,0)
  silkscreen extent -10.5,-8 10.5,8, body extent -10.2,-7.81 10.4,8.06, height 16.35
CONN-TH_4P-P2.00_HX20020-4A_2 [mm]
  rect 1.3x1.3 hole 0.85: 1(0,0)
  round 1.3 hole 0.85: 2(-2,0) 3(-4,0) 4(-6,0)
  body extent -7.88,-2.89 2.12,2.21, height 8
HDR2X3 [mm] "Connector; Header; 3x2 Position"
  rect 2x2 hole 1: 1(0,0)
  round 2 hole 1: 2(0,2.54) 3(2.54,0) 4(2.54,2.54) 5(5.08,0) 6(5.08,2.54)
  silkscreen extent -1.27,-1.27 6.35,3.81
"HZIP25-P-1.0_TB6600HG - HEATSINK" [mil]
  rect 50x90 hole 35.43 paste+0 mask+2: 1(0,0) 2(39.37,157.48) 3(78.74,0) 4(118.11,157.48) 5(157.48,0) 6(196.85,157.48) 7(236.22,0) 8(275.59,157.48) 9(314.96,0) 10(354.33,157.48) 11(393.7,0) 12(433.07,157.48) 13(472.44,0) 14(511.81,157.48) 15(551.18,0) 16(590.55,157.48) 17(629.92,0) 18(669.29,157.48) 19(708.66,0) 20(748.03,157.48) 21(787.4,0) 22(826.77,157.48) 23(866.14,0) 24(905.44,157.48) 25(944.88,0)
  silkscreen extent -1040,145 2031,1704, body extent -1040,-8 2031,1705, height 1583
INDC2012X06N [mm] "Chip Inductor, 2-Leads, Body 2.00x1.25mm, IPC Medium Density"
  rect 1.07x1.47 smd: 1(-0.92,0) 2(0.92,0)
  silkscreen extent -1.7,-1 1.7,1, body extent -1.1,-0.72 1.1,0.72, height 0.6
LQFP-64_L10.0-W10.0-P0.50-LS12.0-BL [mm]
  oval 0.3x2 smd paste+0 mask+0.01: 1(-3.75,-5.75) 2(-3.25,-5.75) 3(-2.75,-5.75) 4(-2.25,-5.75) 5(-1.75,-5.75) 6(-1.25,-5.75) 7(-0.75,-5.75) 8(-0.25,-5.75) 9(0.25,-5.75) 10(0.75,-5.75) 11(1.25,-5.75) 12(1.75,-5.75) 13(2.25,-5.75) 14(2.75,-5.75) 15(3.25,-5.75) 16(3.75,-5.75) 33(3.75,5.75) 34(3.25,5.75) 35(2.75,5.75) 36(2.25,5.75) 37(1.75,5.75) 38(1.25,5.75) 39(0.75,5.75) 40(0.25,5.75) 41(-0.25,5.75) 42(-0.75,5.75) 43(-1.25,5.75) 44(-1.75,5.75) 45(-2.25,5.75) 46(-2.75,5.75) 47(-3.25,5.75) 48(-3.75,5.75)
  oval 2x0.3 smd paste+0 mask+0.01: 17(5.75,-3.75) 18(5.75,-3.25) 19(5.75,-2.75) 20(5.75,-2.25) 21(5.75,-1.75) 22(5.75,-1.25) 23(5.75,-0.75) 24(5.75,-0.25) 25(5.75,0.25) 26(5.75,0.75) 27(5.75,1.25) 28(5.75,1.75) 29(5.75,2.25) 30(5.75,2.75) 31(5.75,3.25) 32(5.75,3.75) 49(-5.75,3.75) 50(-5.75,3.25) 51(-5.75,2.75) 52(-5.75,2.25) 53(-5.75,1.75) 54(-5.75,1.25) 55(-5.75,0.75) 56(-5.75,0.25) 57(-5.75,-0.25) 58(-5.75,-0.75) 59(-5.75,-1.25) 60(-5.75,-1.75) 61(-5.75,-2.25) 62(-5.75,-2.75) 63(-5.75,-3.25) 64(-5.75,-3.75)
  silkscreen extent -5,-5.79 5,5, body extent -6.01,-5.99 5.99,6.01, height 1.48
MMBT3904 [mm] "SOT23, 3-Leads, Body 2.90x2.45mm, Pitch 0.90mm, IPC Medium Density"
  rect 1x1.1 smd: B(-1.2,0.9) C(1.2,0) E(-1.2,-0.9)
  silkscreen extent -2.03,-1.78 2.03,1.78, body extent -0.7,-1.5 0.7,1.5, height 1.1
PCBCOMPONENT_1 [mm]
  rect 0.9x1 smd mask+0.01: 1(-0.65,0) 2(0.65,0)
  silkscreen extent -1.22,-0.64 1.22,0.64, body extent -1.03,-0.39 0.97,0.39, height 0.79
PCBComponent_1 [mm]
  rect 2x2 hole 0.9: 1(-3.81,0)
  round 2 hole 0.9: 2(-1.27,0) 3(1.27,0) 4(3.81,0)
  silkscreen extent -6.1,-2.29 6.1,3.43, body extent -6.2,-2.32 6.2,3.43, height 7
"PinHeader Polar" [mm]
  rect 1.5x1.5 hole 0.9: 1(-1.27,0)
  round 1.5 hole 0.9: 2(1.27,0)
  silkscreen extent -2.54,-3.05 2.54,2.67, body extent -2.54,-3.15 2.54,2.65, height 11.72
R0402 [mm]
  rect 0.566x0.54 smd paste-100 mask+0.051: 1(-0.433,0) 2(0.433,0)
  silkscreen extent -0.81,-0.37 0.84,0.38, body extent -0.58,-0.28 0.58,0.28, height 0.41
RESC1608X06N [mm] "Chip Resistor, 2-Leads, Body 1.60x0.80mm, IPC Medium Density"
  rect 0.9x1 smd mask+0.01: 1(-0.65,0) 2(0.65,0)
  silkscreen extent -1.22,-0.64 1.22,0.64, body extent -0.9,-0.5 0.9,0.5, height 0.55
RESC6431X12N [mm] "Chip Resistor, 2-Leads, Body 6.35x3.05mm, IPC Medium Density"
  rect 2.35x3.25 smd: 1(-2.425,0) 2(2.425,0)
  silkscreen extent -3.85,-1.9 3.85,1.9, body extent -3.2,-1.6 3.2,1.6, height 0.53
SIP-3 [mm]
  rect 1.6x1.6 hole 1.1 paste+0 mask+0.05: 1(5.105,0.076)
  round 1.6 hole 1.1 paste+0 mask+0.05: 2(2.565,0.076) 3(0.025,0.076)
  silkscreen extent -3.26,-5.33 8.34,2.41, body extent -3.16,-5.26 8.34,2.29, height 10.25
SMD3213-3P [mm]
  rect 0.5x1.5 smd paste+0 mask+0.05: 1(-1.2,0) 2(0,0) 3(1.2,0)
  silkscreen extent -1.65,-1.07 1.65,0.64, body extent -1.57,-0.64 1.63,0.66, height 1.02
SOP-4-1.27mm [mm]
  oval 2x0.9 smd: 1(3.5,-0.635) 2(3.5,0.635) 3(-3.5,0.635) 4(-3.5,-0.635)
  silkscreen extent -2.45,-2.05 3.71,1.45, body extent -3.37,-1.3 3.63,1.3, height 2.1
SOP-8_L9.8-W6.6-P2.54-LS10.3-BL [mm]
  rect 1.525x1.78 smd paste+0 mask+0.051: 1(-3.81,-4.545) 2(-1.27,-4.545) 3(1.27,-4.545) 4(3.81,-4.545) 5(3.81,4.545) 6(1.27,4.545) 7(-1.27,4.545) 8(-3.81,4.545)
  silkscreen extent -5.27,-4.19 5.03,3.39, body extent -4.83,-5.15 4.83,5.15, height 4.32
SOT229P700X180-4N [mm] "SOT223, 4-Leads, Body 6.50x7.00mm (avg), Pitch 2.29mm, IPC Medium Density"
  rect 2.15x0.9 smd: GND(-2.93,2.29) Vin(-2.93,-2.29) Vout(-2.93,0)
  rect 2.15x3.25 smd: Vout(2.93,0)
  silkscreen extent -4.17,-3.35 4.17,3.35, body extent -3.55,-3.28 3.45,3.22, height 1.85
SOT-23-3_L2.9-W1.3-P1.90-LS2.4-BR [mm]
  rect 1.25x0.7 smd paste+0 mask+0.051: 1(1,-0.95) 2(1,0.95) 3(-1,0)
  silkscreen extent -0.73,-1.53 0.73,1.53, body extent -1.25,-1.47 1.25,1.53, height 1.05
SW-SMD_L4.0-W3.0-LS4.8 [mm]
  rect 1.35x1.8 smd paste+0 mask+0.051: 1(-2.075,0) 2(2.075,0)
  silkscreen extent -2,-1.5 2,1.5, body extent -2.15,-1.52 2.15,1.43, height 2.01

## Part data
ASM1117: "C347222", Created By=NourAldin
C3 C4 C5 C8 C9 C11 C21 C22 C23 C24 C25 C26 C30 C32 C35 C36 C39 C41 C42 C43 C46 C47 C50 C52 C53 C54 C57 C58 C61 C63 C64 C65 C66 C68 C70 C71 C72 C73 C74 C77 C79 C80 C81 C84 C85 C86 C89 C91 C92 C93: library part "0603 Capacitor", "C1591", Created By=NourAldin, DataSheet Link=https://eu.mouser.com/datasheet/2/400/lcc_automotive_general_en-843974.pdf, Mouser Link=https://eu.mouser.com/ProductDetail/TDK/CGA1A2X7R1H331M030BA?qs=sGAEpiMZZMs0AnBnWHyRQL8L3bkL%252bvtyS9XpSB1mk7rVV5K8%252bbxEeg%3d%3d
C6 C38 C49 C60 C76 C88: library part A759EQ475M2AAAE160, "C2691843", Manufacturer=KEMET, Supplier Part Number 1=80-A759EQ475M2AAE160, Category="Polymer Capacitors", ComponentLink1Description=http://www.kemet.com/docfinder?Partnumber=A759EQ475M2AAAE160&src-supplier=Digikey, ComponentLink1URL=http://www.kemet.com/docfinder?Partnumber=A759EQ475M2AAAE160&src-supplier=Digikey, ComponentLink2Description=http://www.farnell.com/datasheets/2095614.pdf?src-supplier=Element14, ComponentLink2URL=http://www.farnell.com/datasheets/2095614.pdf?src-supplier=Element14, Manufacturer Part Number=A759EQ475M2AAAE160, Pricing 1="1=0.97, 10=0.73, 50=0.73, 100=0.546, 1000=0.384, 10000=0.326 (USD)", RoHS=Yes, Stock 1=17219, Supplier 1=Mouser
C7 C37 C48 C59 C75 C87: library part "0603 Capacitor", "C96446", Created By=NourAldin, DataSheet Link=https://eu.mouser.com/datasheet/2/400/lcc_automotive_general_en-843974.pdf, Mouser Link=https://eu.mouser.com/ProductDetail/TDK/CGA1A2X7R1H331M030BA?qs=sGAEpiMZZMs0AnBnWHyRQL8L3bkL%252bvtyS9XpSB1mk7rVV5K8%252bbxEeg%3d%3d
C10 C17 C28 C40 C51 C62 C78 C90: library part "0603 Capacitor", "C1592", Created By=NourAldin, DataSheet Link=https://eu.mouser.com/datasheet/2/400/lcc_automotive_general_en-843974.pdf, Mouser Link=https://eu.mouser.com/ProductDetail/TDK/CGA1A2X7R1H331M030BA?qs=sGAEpiMZZMs0AnBnWHyRQL8L3bkL%252bvtyS9XpSB1mk7rVV5K8%252bbxEeg%3d%3d
C12: library part A759EQ475M2AAAE160, "C47891", Manufacturer=KEMET, Supplier Part Number 1=80-A759EQ475M2AAE160, Category="Polymer Capacitors", ComponentLink1Description=http://www.kemet.com/docfinder?Partnumber=A759EQ475M2AAAE160&src-supplier=Digikey, ComponentLink1URL=http://www.kemet.com/docfinder?Partnumber=A759EQ475M2AAAE160&src-supplier=Digikey, ComponentLink2Description=http://www.farnell.com/datasheets/2095614.pdf?src-supplier=Element14, ComponentLink2URL=http://www.farnell.com/datasheets/2095614.pdf?src-supplier=Element14, Manufacturer Part Number=A759EQ475M2AAAE160, Pricing 1="1=0.97, 10=0.73, 50=0.73, 100=0.546, 1000=0.384, 10000=0.326 (USD)", RoHS=Yes, Stock 1=17219, Supplier 1=Mouser
C13 C16 C20: library part A759EQ475M2AAAE160, "C45099", Manufacturer=KEMET, Supplier Part Number 1=80-A759EQ475M2AAE160, Category="Polymer Capacitors", ComponentLink1Description=http://www.kemet.com/docfinder?Partnumber=A759EQ475M2AAAE160&src-supplier=Digikey, ComponentLink1URL=http://www.kemet.com/docfinder?Partnumber=A759EQ475M2AAAE160&src-supplier=Digikey, ComponentLink2Description=http://www.farnell.com/datasheets/2095614.pdf?src-supplier=Element14, ComponentLink2URL=http://www.farnell.com/datasheets/2095614.pdf?src-supplier=Element14, Manufacturer Part Number=A759EQ475M2AAAE160, Pricing 1="1=0.97, 10=0.73, 50=0.73, 100=0.546, 1000=0.384, 10000=0.326 (USD)", RoHS=Yes, Stock 1=17219, Supplier 1=Mouser
C14: library part A759EQ475M2AAAE160, "C2029", Manufacturer=KEMET, Supplier Part Number 1=80-A759EQ475M2AAE160, Category="Polymer Capacitors", ComponentLink1Description=http://www.kemet.com/docfinder?Partnumber=A759EQ475M2AAAE160&src-supplier=Digikey, ComponentLink1URL=http://www.kemet.com/docfinder?Partnumber=A759EQ475M2AAAE160&src-supplier=Digikey, ComponentLink2Description=http://www.farnell.com/datasheets/2095614.pdf?src-supplier=Element14, ComponentLink2URL=http://www.farnell.com/datasheets/2095614.pdf?src-supplier=Element14, Manufacturer Part Number=A759EQ475M2AAAE160, Pricing 1="1=0.97, 10=0.73, 50=0.73, 100=0.546, 1000=0.384, 10000=0.326 (USD)", RoHS=Yes, Stock 1=17219, Supplier 1=Mouser
C15: library part MAL215058101E3, "C2960279", Manufacturer="Vishay BCcomponents", Supplier Part Number 1=594-2222-150-58101, Category="Aluminum Electrolytic Capacitors", ComponentLink1Description=https://datasheet.ciiva.com/11697/150rmi-11697723.pdf?src-supplier=Avnet, ComponentLink1URL=https://datasheet.ciiva.com/11697/150rmi-11697723.pdf?src-supplier=Avnet, Manufacturer Part Number=MAL215058101E3, Pricing 1="1=1.45, 10=1.09, 50=1.09, 100=0.799, 1000=0.585, 10000=0.496 (USD)", RoHS=Yes, Stock 1=1562, Supplier 1=Mouser, Supplier 2=LCSC, Supplier Part Number 2=C1596751
C18 C19: library part "0603 Capacitor", "C2762594", Created By=NourAldin, DataSheet Link=https://eu.mouser.com/datasheet/2/400/lcc_automotive_general_en-843974.pdf, Mouser Link=https://eu.mouser.com/ProductDetail/TDK/CGA1A2X7R1H331M030BA?qs=sGAEpiMZZMs0AnBnWHyRQL8L3bkL%252bvtyS9XpSB1mk7rVV5K8%252bbxEeg%3d%3d
C27: library part "0603 Capacitor", "C69335", Created By=NourAldin, DataSheet Link=https://eu.mouser.com/datasheet/2/400/lcc_automotive_general_en-843974.pdf, Mouser Link=https://eu.mouser.com/ProductDetail/TDK/CGA1A2X7R1H331M030BA?qs=sGAEpiMZZMs0AnBnWHyRQL8L3bkL%252bvtyS9XpSB1mk7rVV5K8%252bbxEeg%3d%3d
C29: library part "0603 Capacitor", "C100042", Created By=NourAldin, DataSheet Link=https://eu.mouser.com/datasheet/2/400/lcc_automotive_general_en-843974.pdf, Mouser Link=https://eu.mouser.com/ProductDetail/TDK/CGA1A2X7R1H331M030BA?qs=sGAEpiMZZMs0AnBnWHyRQL8L3bkL%252bvtyS9XpSB1mk7rVV5K8%252bbxEeg%3d%3d
C31: library part "3528  Tantalum Cap", "C7206", JLCPCB Part Class="Extended Part", Manufacturer="Kyocera AVX", Manufacturer Part=TAJR106K006RNJ, Contributor=LCSC, nameAlias=Value, spicePre=C, spiceSymbolName=TAJR106K006RNJ, Supplier=LCSC, Supplier Part=C132274
F1: library part "Header 2 pin", "C492401", Created By=NourAldin
J5: library part ZX-HY2.0-4PZZ, "C42372479", Colour=White, Current Rating (Max)=2A, Flame Retardant Rating=UL94V-0, JLCPCB Part Class="Extended Part", LCSC Part Name="1x4P 间距:2mm 直插 系列:HY 配套胶壳型号：ZX-HY2.0-4PJK 配套端子型号：ZX-HY2.0-DZ 配套杜邦线型号：ZX-HY2.0-4PBXC", Manufacturer=Megastar(兆星), Operating Temperature Range=-25℃~+85℃, Rated Voltage (Max)=250V, Add into BOM=yes, Contact Material=Brass, Contact Plating=Tin, Convert to PCB=yes, DataSheet=https://atta.szlcsc.com/upload/public/pdf/source/20241025/5A7CD93910E89EF197073334521200FC.pdf, Device=ZX-HY2.0-4PZZ, Manufacturer Part=ZX-HY2.0-4PZZ, Mounting Style="Direct Insert", Number of Pins=4P, Number of PINs Per Row=4, Number of Rows=1, Pins Structure=1x4P, Pitch=2mm, Plastic Material=-, Reference Series=HY, Row Spacing=-, Supplementary Features=-, Supplier=LCSC, Supplier Footprint=插件,P=2mm, Supplier Part=C7429580, Symbol=ZX-HY2.0-4PZZ, X-Length of Bottom Edge on Board (Spacing Line)=10mm, Y-Width of Bottom Edge on Board=5.1mm, Z-Height of the Board=8mm
L1: library part "0805 SMD INDUCTOR", "C99366", Created By=NourAldin
LED1 LED3 LED4 LED5 LED6 LED7: "C434438", Created By=NourAldin
LED2: "C434442", Created By=NourAldin
P1: "C8397", Color=Black, Current Rating (Max)=32A, JLCPCB Part Class="Extended Part", LCSC Part Name="9.5mm 1x2P 每排P数:2 排数:1 直针 中脚", Manufacturer=KANGNEX(康奈克斯电气), Operating Temperature Range=-40℃~+105℃, Voltage Rating (Max)=750V, Add into BOM=yes, Barrier Type=两面, Convert to PCB=yes, DataSheet=https://atta.szlcsc.com/upload/public/pdf/source/20191225/C8397_C0B2C2E73138A510EBF0F13B91F71912.pdf, Device=WJ45C-B-9.5-2P, Manufacturer Part=WJ45C-B-9.5-2P, Mounting Style=直针, Number of Pins=2P, Number of PINs Per Row=2, Number of Rows=1, Pin Location=中脚, Pitch=9.5mm, Structure=1x2P, Supplier=LCSC, Supplier Footprint=插件,P=9.5mm, Supplier Part=C8397, Symbol=WJ45C-B-2P, Wire Gauge - AWG=12~22, Wire Gauge - mm2=4
Q1 Q2 Q3 Q4 Q5 Q6: library part BSS138_MOSFET, JLCPCB Part Class="Extended Part", Manufacturer=YANGJIE(扬杰), Manufacturer Part=BSS138, Contributor=LCSC, spicePre=Q, spiceSymbolName=BSS138_C400505, Supplier=LCSC, Supplier Part=C400505
R2 R4 R6 R8 R11 R13 R17 R19 R21 R23 R24 R30 R34 R36 R38 R40 R41 R43 R44 R51 R55 R57 R59 R61 R62 R64 R65 R71 R75 R77 R79 R81 R82 R86 R87 R93 R97 R99 R101 R103 R104 R106 R107 R113 R117 R119 R121 R123 R124: library part "0402 Resistor", "C105871"
R5 R25 R45 R48 R66 R83 R84 R88 R108: library part "0603 Resistor", "C2930081", Created By=NourAldin, DataSheet Link=https://eu.mouser.com/datasheet/2/315/AOA0000C307-1149632.pdf, Mouser Link=https://eu.mouser.com/ProductDetail/Panasonic/ERA-3AHD180V?qs=sGAEpiMZZMvdGkrng054t5mej2KPdPuFSlDBd1tSiF0%3d
R7 R39 R60 R80 R102 R122: library part "0402 Resistor", "C106235"
R9 R10 R27 R28 R47 R49 R68 R69 R90 R91 R110 R111: library part "0603 Resistor", "C126359", Created By=NourAldin, DataSheet Link=https://eu.mouser.com/datasheet/2/315/AOA0000C307-1149632.pdf, Mouser Link=https://eu.mouser.com/ProductDetail/Panasonic/ERA-3AHD180V?qs=sGAEpiMZZMvdGkrng054t5mej2KPdPuFSlDBd1tSiF0%3d
R12 R29 R50 R70 R92 R112: library part "0603 Resistor", "C100044", Created By=NourAldin, DataSheet Link=https://eu.mouser.com/datasheet/2/315/AOA0000C307-1149632.pdf, Mouser Link=https://eu.mouser.com/ProductDetail/Panasonic/ERA-3AHD180V?qs=sGAEpiMZZMvdGkrng054t5mej2KPdPuFSlDBd1tSiF0%3d
R14 R31 R52 R72 R94 R114: library part "0402 Resistor", "C107230"
R15 R16 R32 R33 R53 R54 R73 R74 R95 R96 R115 R116: library part "2512 Resistor", "C2903473", Created By=NourAldin, DataSheet Link=https://eu.mouser.com/datasheet/2/54/ss2h-2512-1302652.pdf, Mouser Link=https://eu.mouser.com/ProductDetail/Bourns/CSS2H-2512K-2L00F?qs=sGAEpiMZZMukHu%252bjC5l7YewuupLM8jZrvWs15Y6t0rY%3D&fbclid=IwAR0ZD_uc1Y03YG_KyYG8NxrpBzYgFzVeevvjxrlqtGWJ1HKz-jrYfqlFWCw
R18 R20 R35 R37 R56 R58 R76 R78 R98 R100 R118 R120: library part "0402 Resistor", "C105875"
S1: "C42431837", LatestRevisionDate=17-Jul-2002, LatestRevisionNote="Re-released for DXP Platform.", Publisher="Altium Limited"
Stepper1 Stepper2 Stepper3 Stepper4 Stepper5 Stepper6: "C144395"
SW5: library part "tact switch", JLCPCB Part Class="Extended Part", Manufacturer=Yuandi(元迪), Manufacturer Part=TS-1071AS-A1B3-D4, Contributor=LCSC, spicePre=S, spiceSymbolName=TS-1071AS-A1B3-D4, Supplier=LCSC, Supplier Part=C492861
T2 T3 T5 T6 T8 T9 T11 T12 T14 T15 T17 T18: "C108429", Created By=NourAldin
U2 U13 U19 U25 U32 U38: library part TLP291(GB-TP,SE(T, "C55144", BOM_JLCPCB Part Class="Extended Part", BOM_Manufacturer=TOSHIBA(东芝), BOM_Supplier=LCSC, LCSC Link=https://www.lcsc.com/product-detail/Optocouplers-Phototransistor-Output_TOSHIBA-TLP291-GB-TP-SE_C55144.html, Manufacturer Part Number=TLP291(GB-TP,SE, spiceSymbolName=TLP291(GB-TP,SE(T, Supplier Part Number 2=C55144
U3 U9 U15 U21 U28 U34: "C66042", JLCPCB Part Class="Extended Part", LCSC Part Name="4.5A 42V电机驱动芯片", Manufacturer=TOSHIBA(东芝), Add into BOM=yes, Convert to PCB=yes, DataSheet=https://atta.szlcsc.com/upload/public/pdf/source/20170511/1494500127812.pdf, Device=TB6600HG, Manufacturer Part=TB6600HG, Supplier=LCSC, Supplier Footprint=HZIP-25-P-1mm, Supplier Part=C66042, Symbol=TB6600HG
U4 U10 U16 U22 U29 U35: "C115877", Input Voltage=2V~5.5V, JLCPCB Part Class="Extended Part", Manufacturer=TI(德州仪器), Operating Temperature=-40℃~+125℃@(Ta), Output Current=5mA, Output Voltage=1.8V, Supply Current=8.5uA, Temperature Coefficient=30ppm/℃, Tolerance=±0.15%, Add into BOM=yes, Convert to PCB=yes, DataSheet=https://www.ti.com/cn/lit/gpn/ref3318, Device=REF3318AIDBZR, LCSC Part Name=REF3318AIDBZR, Manufacturer Part=REF3318AIDBZR, Noise - 1/10Hz to 10Hz=50uVp-p, Noise - 10Hz to 10kHz=-, Output Type=Fixed, Reference Type="series connection", Supplier=LCSC, Supplier Footprint=SOT-23, Supplier Part=C115877, Symbol=REF3318AIDBZR
U5 U6 U11 U12 U17 U18 U23 U24 U30 U31 U36 U37: "C92651", JLCPCB Part Class="Extended Part", LCSC Part Name="DC输入 1通道", Manufacturer=LITEON(光宝), Operating Temperature=-40℃~+85℃, Supply Voltage=4.5V~5.5V, Add into BOM=yes, Common Mode Transient Immunity (CMTI)=10kV/us, Convert to PCB=yes, Data Rate=15Mbit/s, DataSheet=https://atta.szlcsc.com/upload/public/pdf/source/20191018/C92651_D1F9F6F1F10C7EC7C3739E5ECB700036.pdf, Device=6N137S-TA1-L, Input type=DC, Manufacturer Part=6N137S-TA1-L, Number of Channels=1, Propagation Delay tpLH/tpHL=32ns；40ns, Supplier=LCSC, Supplier Footprint=SOP-8-2.54mm, Supplier Part=C92651, Symbol=6N137S-TA1
U7: library part K7805M-1000R3_C5369649, Input Voltage(DC)=7V~36V, JLCPCB Part Class="Extended Part", LCSC Part Name=K7805M-1000R3, Manufacturer=YLPTEC(易川), Maximum Capacitive Load=2200uF, Output Current (Max)=1000mA, Output Power=5W, Output Voltage=5V, Add into BOM=yes, Conversion Efficiency=94%, Conversion Type=DC-DC, Convert to PCB=yes, DataSheet=https://atta.szlcsc.com/upload/public/pdf/source/20230612/70568B8922D00E56BE7D7C892197C716.pdf, Device=K7805M-1000R3_C5369649, Feature="Short-Circuit  Protection；Low-Power Consumption", Function="Boost type", Manufacturer Part=K7805M-1000R3, Output Channel=1, Supplier=LCSC, Supplier Footprint=SIP-3, Supplier Part=C5369649, Symbol=K7805M-1000R3_C5369649
U26: library part STM32F401RCT6, "C74524", JLCPCB Part Class="Extended Part", Manufacturer=ST(意法半导体), Manufacturer Part=STM32F401RCT6, spicePre=U, spiceSymbolName=STM32F401RCT6, Supplier=LCSC, Supplier Part=C74524
X1: library part CSTCE16M0V53-R0, "C907975", Capacitance=15pF, Case/Package=SMD/SMT, Frequency=16MHz, Frequency Stability=0.3%, Frequency Tolerance=0.5%, Manufacturer=Murata, Max Operating Temperature=85°C, Min Operating Temperature=-40°C, Supplier Part Number 1=490-1198-2-ND, Category=Resonators, ComponentLink1Description=https://www.murata.com/en/products/productdata/8801162231838/SPEC-CSTNE16M0V530000R0.pdf?src-supplier=Digi-Key, ComponentLink1URL=https://www.murata.com/en/products/productdata/8801162231838/SPEC-CSTNE16M0V530000R0.pdf?src-supplier=Digi-Key, Impedance=40R, LCSC Link=https://www.lcsc.com/product-detail/Ceramic-Resonators_Murata-Electronics-CSTCE16M0V53-R0_C32180.html, Manufacturer Part Number=CSTCE16M0V53-R0, Mount="Surface Mount", Packaging="Cut Tape", RoHS=Yes, RoHS Compliant=Yes, Series="CERALOCK® CSTNE", Supplier 1=Digi-Key, Supplier Part Number 2=C32180

## Free pads (board coordinates)
  round 3.5 hole 3: ""(3.302,70.282) ""(23.724,13.183) ""(484.48,14.427) ""(484.48,70.282)

## Via types
v1: diameter 1, hole 0.6, Top Layer to Bottom Layer, tented both sides, 342 vias
v2: diameter 0.8, hole 0.4, Top Layer to Bottom Layer, tented both sides, 207 vias
v3: diameter 0.6, hole 0.4, Top Layer to Bottom Layer, tented both sides, 109 vias

## Nets (pads, with @x,y where several pads share a name; then routed paths per layer and width w, separated by ;. In a path a pad name is that pad's centre, name@x,y a point inside that pad or via, vN(x,y) a via of type N, cw(c..) or ccw(c..) an arc to the next point about the centre after c; other vN are vias at no path point)
+3.3V_uC: ASM1117.Vout C19.2 C22.2 C23.2 C24.2 C25.2 C26.2 C27.2 C28.2 C29.2 C30.2 L1.1 R83.1 S1.6 U26.1 U26.19 U26.32 U26.48 U26.64 | length 30.1
  Top Layer w0.25: C26.2@22.367,58.268 22.427,58.328 U26.64@25.111,58.328 ; v3(22.504,56.647) C26.2@22.504,58.105 ; v3(24.897,54.407) C22.2@26.355,54.407 ; v3(25.074,69.672) C25.2@26.533,69.672 ; C22.2@26.797,54.346 27.111,54.659 U26.1@27.111,56.328 ; U26.48@27.111,67.827 27.111,69.496 C25.2@26.924,69.683 C27.2@28.321,69.683 ; v3(30.023,46.69) R83.1@30.023,48.148 ; L1.1@33.147,52.014 32.893,51.76 C29.2@32.893,50.155 32.908,50.14 C28.2@34.29,50.14 ; C28.2@34.504,50.19 v3(35.962,50.19) ; U26.19@36.611,59.328 39.184,59.328 C23.2@39.228,59.284 ; U26.32@36.611,65.828 36.611,66.309 36.951,66.65 C24.2@38.339,66.65 ; C24.2@38.252,66.863 v3(38.252,68.321) ; v3(39.243,57.713) C23.2@39.243,59.172 ; S1.6@67.564,65.659 67.564,67.148 68.844,68.428 C30.2@68.844,68.478
  other v3: 19.406,67.716 10.643,69.469 20.041,69.952 10.668,70.612 19.431,72.187